# Altium PCB JWB-001.PcbDoc (part 1 of 2)
Units mil, origin at the board's own origin, x right, y up, seen from the top; angles counter-clockwise.
Board outline 944.88 x 944.88 mil, 4 copper layers (Top, Layer 2, Layer 3, Bottom), stack 35.2 mil thick; 81 components, 68 nets, 347 pads, 153 vias.
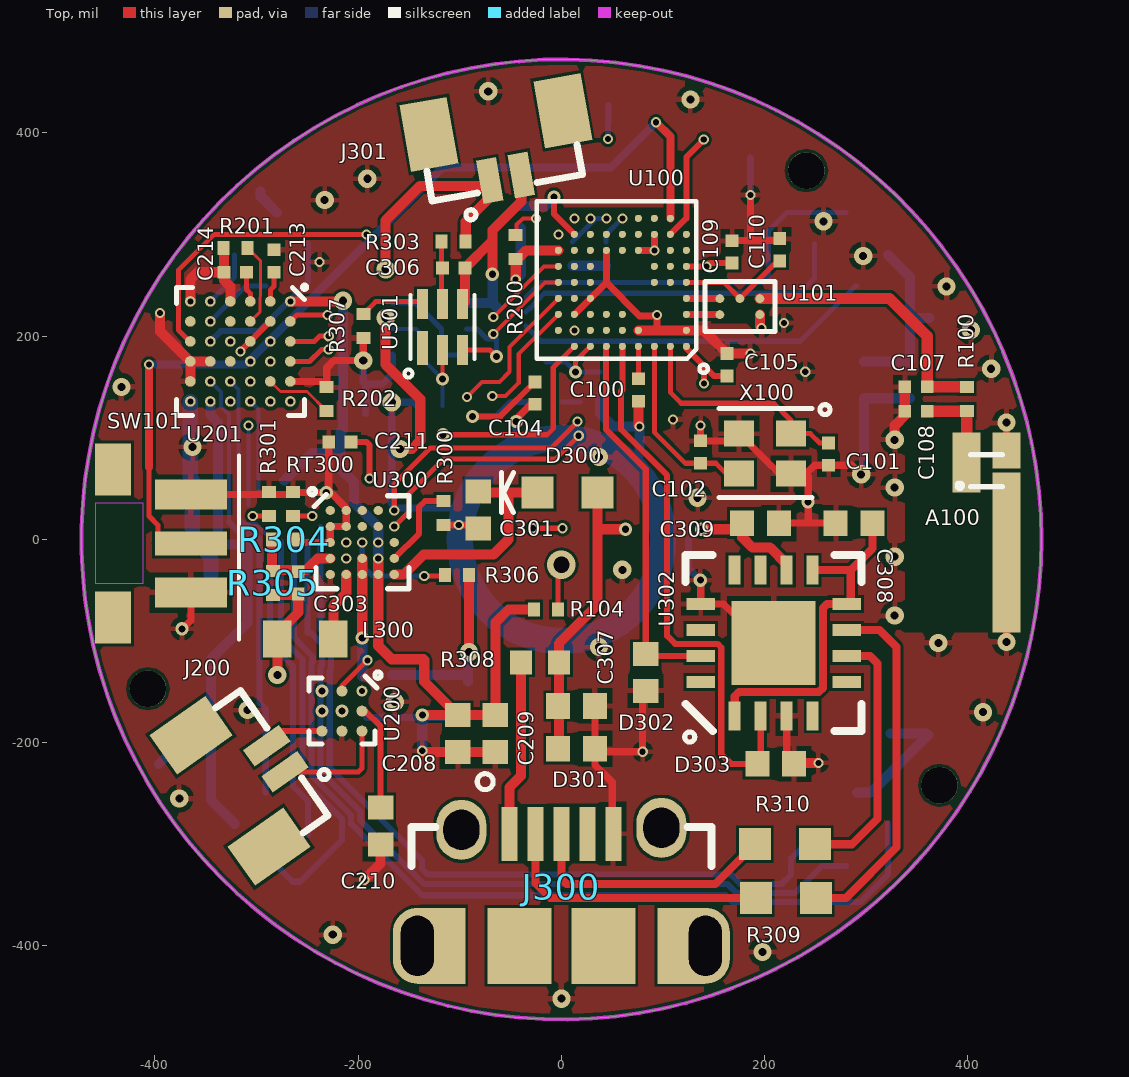
[diagram p0: Top view]
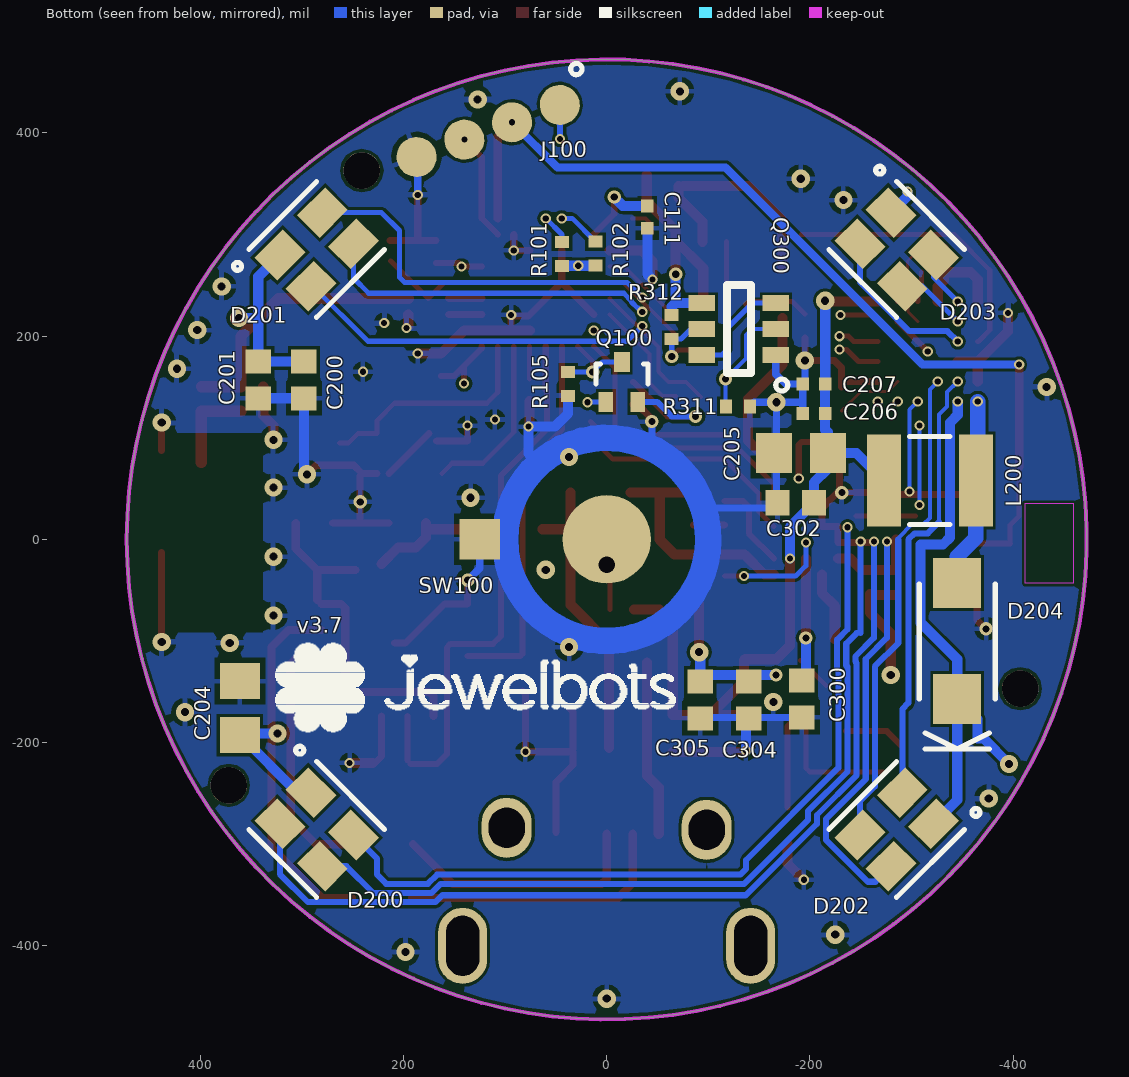
[diagram p1: Bottom view, seen from below]
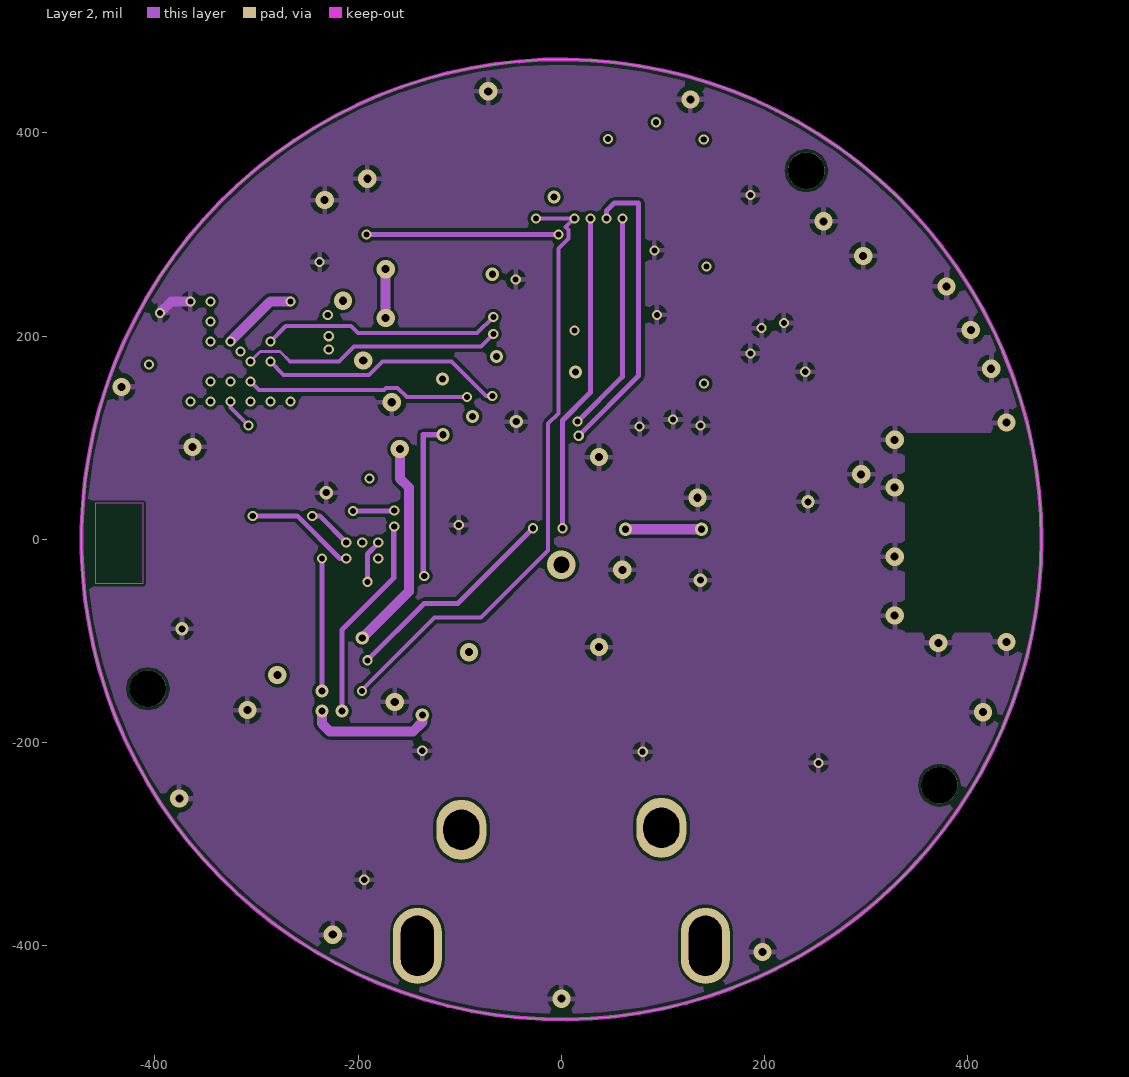
[diagram p2: Layer 2]
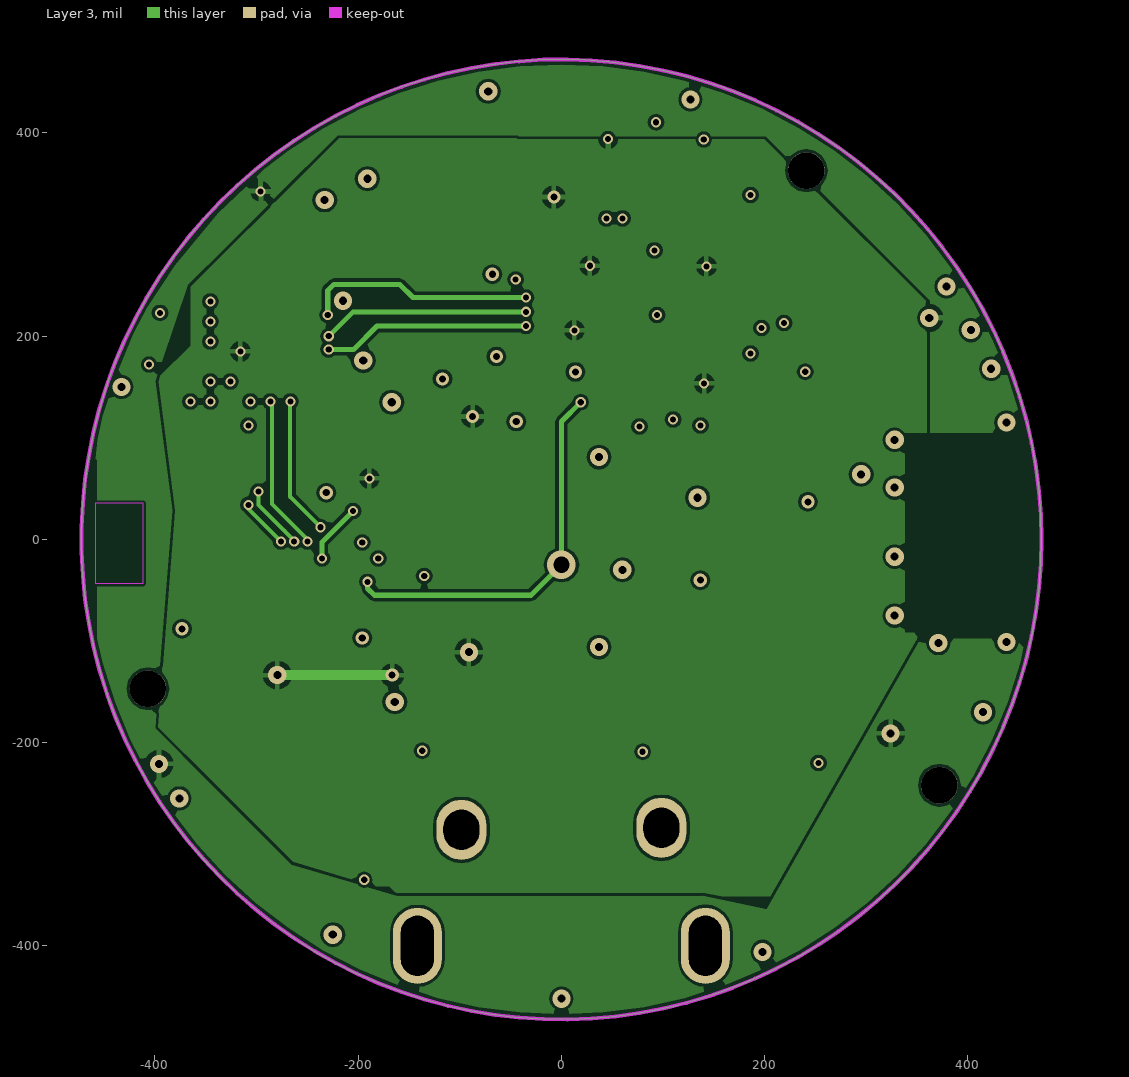
[diagram p3: Layer 3]

## Layer stack, top to bottom
Top Solder: solder mask 0.4, Solder Resist, Dk 3.5
Top: signal copper 1.4
Core 1: prepreg 6, 370HR, Dk 4.02
Layer 2: signal copper 0.7
Core 2: core 19, 370HR, Dk 4.02
Layer 3: signal copper 0.7
Core 3: prepreg 6, 370HR, Dk 4.02
Bottom: signal copper 1.4
Bottom Solder: solder mask 0.4, Solder Resist, Dk 3.5

## Board outline
0,-472.44 cw(c0,0) -472.44,0 cw(c0,0) 0,472.44 cw(c0,0) 472.44,0 cw(c0,0)

## Design rules (kind name [scope] priority, off if disabled: settings)
Clearance Clearance_U200 [InComponent('U200') OR InComponent('U201')] p1: gap=4 except(2.92: Arc-Track Arc-SMDPad Track-Track Track-SMDPad; 2.99: SMDPad-SMDPad; 3: Arc-Arc Arc-THPad Arc-Via Track-THPad Track-Via SMDPad-THPad SMDPad-Via THPad-THPad THPad-Via Via-Via)
Clearance [All] p2: gap=3
Height [All] p1: minheight=0 maxheight=1000 prefheight=100
HoleSize [All] p1: absolutevalues=TRUE maxlimit=100 minlimit=6 maxpercent=80.000 minpercent=20.000
HoleToHoleClearance [All] p1: gap=6 allowstackedmicrovias=TRUE
MinimumSolderMaskSliver [All] p1: minsoldermaskwidth=1
PlaneClearance [All] p1: clearance=4
PolygonConnect [All] p1: connectstyle=Relief reliefconductorwidth=5 reliefentries=4 polygonreliefangle="90 Angle" airgapwidth=5
RoutingVias [All] p1: holewidth=7 width=13 viastyle="Through Hole" minholewidth=6 minwidth=10 maxholewidth=28 maxwidth=50
SilkToSilkClearance [All] p1: silktosilkclearance=1
SilkToSolderMaskClearance [IsPad] p1: minsilkscreentomaskgap=0 clearancetoexposedcopper=TRUE
SolderMaskExpansion SolderMaskExpansion_via [IsVia] p1: expansion=-10
SolderMaskExpansion [All] p2: expansion=2
Width [All] p1: maxlimit=100 minlimit=3 preferedwidth=6
23 further rules are at their usual default settings.

## Classes and differential pairs
component class Interfaces: C200 C201 C204 C205 C206 C207 C208 C209 C210 C211 C213 C214 D200 D201 D202 D203 D204 J200 L200 R200 R201 R202 U200 U201
component class "Power Supplies": C300 C301 C302 C303 C304 C305 C306 C307 C308 C309 D300 D301 D302 D303 J300 J301 L300 Q300 R300 R301 R303 R304 R305 R306 R307 R308 R309 R310 R311 R312 RT300 U300 U301 U302
component class Top: A100 C100 C101 C102 C104 C105 C107 C108 C109 C110 C111 J100 Q100 R100 R101 R102 R104 R105 SW100 SW101 U100 U101 X100

## Components (designator, comment, footprint, x,y, rotation, side; value= is the part's Value field where it differs from the comment)
A100 "Part Number" 2450AT07A0100 418.6,67.6 r270 top
C100 "Part Number0.1uFDNP" "Cap 0201 HD" 76,147 r270 top
C101 "Part Number15pFDNP" "Cap 0201 HD" 263,84 r270 top
C102 "Part Number15pFDNP" "Cap 0201 HD" 137,86 r90 top
C104 "Part Number0.1uFDNP" "Cap 0201 HD" -26,144 r270 top
C105 "Part Number1nFDNP" "Cap 0201 HD" 163,171.98 r90 top
C107 "Part NumberDNPDNP" "Cap 0201 HD" 349,150.19 r180 top
C108 "Part NumberDNPDNP" "Cap 0201 HD" 349,126.19 r180 top
C109 "Part Number47nFDNP" "Cap 0201 HD" 168,283 r90 top
C110 "Part Number2.2nFDNP" "Cap 0201 HD" 215,285 r90 top
C111 "Part Number0.1uFDNP" "Cap 0201 HD" -39.99,317.24 r270 bottom
C200 "Part Number1.0uFDNP" "Cap 0402 HD" 298,157 r270 bottom
C201 "Part Number1.0uFDNP" "Cap 0402 HD" 343,157 r270 bottom
C204 "Part Number10uFDNP" "Cap 0603" 361,-166 r90 bottom
C205 "Part Number10uFDNP" "Cap 0603" -191,85 r0 bottom
C206 "Part Number0.1uFDNP" "Cap 0201 HD" -204,124 r0 bottom
C207 "Part Number0.1uFDNP" "Cap 0201 HD" -204.02,153 r0 bottom
C208 "Part Number4.7uFDNP" "Cap 0402 HD" -102,-191 r270 top
C209 "Part Number1.0uFDNP" "Cap 0402 HD" -65,-191 r270 top
C210 "Part Number1.0uFDNP" "Cap 0402 HD" -178,-282 r270 top
C211 "Part Number0.1uFDNP" "Cap 0201 HD" -218,96 r180 top
C213 "Part Number1.0uFDNP" "Cap 0201 HD" -283,273.98 r90 top
C214 "Part Number0.1uFDNP" "Cap 0201 HD" -321,263 r0 top
C300 "Part Number4.7uFDNP" "Cap 0402 HD" -192,-157 r270 bottom
C301 "Part Number1.0uFDNP" "Cap 0402 HD" -82,29 r270 top
C302 "Part Number4.7uFDNP" "Cap 0402 HD" -186,36 r0 bottom
C303 "Part Number22pFDNP" "Cap 0201 HD" -259,-42.81 r90 top
C304 "Part Number4.7uFDNP" "Cap 0402 HD" -140,-158 r270 bottom
C305 "Part Number1.0uFDNP" "Cap 0402 HD" -92,-158 r270 bottom
C306 "Part Number0.1uFDNP" "Cap 0201 HD" -106,267 r0 top
C307 "Part Number1.0uFDNP" "Cap 0402 HD" 15,-164 r0 top
C308 "Part Number0.1uFDNP" "Cap 0402 HD" 288,16 r180 top
C309 "Part Number4.7uFDNP" "Cap 0402 HD" 196,16 r0 top
D200 "Part Number" 4-PLCC 285.43,-285.43 r45 bottom
D201 "Part Number" 4-PLCC 285.43,285.43 r315 bottom
D202 "Part Number" 4-PLCC -285.43,-285.43 r135 bottom
D203 "Part Number" 4-PLCC -285.43,285.43 r45 bottom
D204 "Part NumberVoltage Rated" SOD-123F_U -345,-100 r90 bottom
D300 "Part NumberVoltage Rated" "Diode 0603 HD" 6,46 r180 top
D301 "Part NumberVoltage Rated" "CAP 0402 HD" 15,-206 r0 top
D302 "Part NumberVoltage Rated" "CAP 0402 HD" 83,-131 r90 top
D303 "Part NumberVoltage Rated" "CAP 0402 HD" 211,-221 r0 top
J100 "Part NumberDNP" TP10R_1.27P-4Pin 116.64,402 r340 bottom
J200 "BM02B-SURS-TF_1" BM02B-SURS-TF -281,-216 r125 top
J300 "Part Number" USB_Micro_RA_W-TABS 0,-400 r0 top
J301 "BM02B-SURS-TF_1" BM02B-SURS-TF -55,356 r10 top
L200 "Part Number4.7uHDNP" "IND 1008" -318,58 r180 bottom
L300 "Part Number2.2uHDNP" "IND 0603" -252,-98 r180 top
Q100 "Part Number" SOT-723 -15,155 r90 bottom
Q300 "Part Number" SC70-6 -130,207 r0 bottom
R100 "Part Number0DNP" "RES 0201 HD" 399,138.19 r270 top
R101 "Part Number3.3kDNP" "RES 0201 HD" 44,281 r270 bottom
R102 "Part Number3.3kDNP" "RES 0201 HD" 11,281.19 r270 bottom
R104 "Part Number10kDNP" "RES 0201 HD" -15.19,-69 r180 top
R105 "Part Number10kDNP" "RES 0201 HD" 38,153 r90 bottom
R200 "Part Number10kDNP" "RES 0201 HD" -45,288 r90 top
R201 "Part Number82kDNP" "RES 0201 HD" -320.81,287 r0 top
R202 "Part Number30.1kDNP" "RES 0201 HD" -231,138 r270 top
R300 "Part Number4.12kDNP" "RES 0201 HD" -116,26 r90 top
R301 "Part Number10kDNP" "RES 0201 HD" -288,35 r270 top
R303 "Part Number330DNP" "RES 0201 HD" -106,293 r0 top
R304 "Part Number150kDNP" "RES 0201 HD" -273,0 r180 top
R305 "Part Number301kDNP" "RES 0201 HD" -284,-42.81 r270 top
R306 "Part Number10kDNP" "RES 0201 HD" -103,-35 r0 top
R307 "Part Number2.2kDNP" "RES 0201 HD" -195,210 r90 top
R308 "Part Number0DNP" "RES 0402" -21,-121 r0 top
R309 "Part Number27DNP" "RES 0603 HD" 221,-353 r0 top
R310 "Part Number27DNP" "RES 0603 HD" 220,-300 r0 top
R311 "Part NumberDNPDNP" "RES 0201 HD" -129,131 r0 bottom
R312 "Part NumberDNPDNP" "RES 0201 HD" -64,209 r270 bottom
RT300 "Res Thermal" "RES 0201 HD" -264,35 r90 top
SW100 "Part Number" GX05170 0,0 r0 bottom
SW101 "TL3340" TL3340 -400,-4 r270 top
U100 "Part NumberDNP" CFAC_WLCSP 60,253 r180 top
U101 "Part Number" BGA0.4P2x3-5Pin 175.68,229.13 r0 top
U200 "Part Number" BGA0.5P3x3-9Pin -216,-169 r270 top
U201 "Part NumberDNP" BGA0.5P6x6-36Pin -316,185 r270 top
U300 "Part NumberDNP" BGA0.4P5x5-25Pin -196,-3 r0 top
U301 "Part Number" SON0.5P-6Pin -117,209 r90 top
U302 "Part Number" QFN0.65P4x4-16Pin_W-Pad 209,-102 r90 top
X100 "Part NumberDNP" XTAL_ABM11-16 200.37,84.41 r180 top

## Footprints (in the part's own frame and the unit in brackets; to place one, negate y for a bottom-side part, rotate by r counter-clockwise, add the part's x,y. Pads: shape width x height; smd on the part's side, far side on the other; paste and mask are expansions set on the pad)
4-PLCC [mm] "4 Pin Plastic Leaded Chip Carrier, 2mm x 2mm"
  rect 1x0.8 smd: 1(0.75,-0.55) 2(-0.75,-0.55) 3(-0.75,0.55) 4(0.75,0.55)
  silkscreen extent -1.2,-1.2 1.8,1.2, body extent -1.05,-1.05 1.05,1.05, height 1
2450AT07A0100 [mm] "Chip Antenna, 4 pin w/keepout area"
  rect 1.5x0.7 smd paste-0.4 mask-0.4: 1(-0.2,-0.5)
  rect 4x0.7 smd paste-2 mask-2: 2(2.05,0.5)
  rect 0.9x0.7 smd paste-0.45 mask-0.45: 3(-0.5,0.5)
  Multi-Layer pour cut-out: -0.95,0.95 -0.95,-2.05 4.05,-2.05 4.05,0.95
  silkscreen extent -0.4,-0.74 0.44,0.4, body extent -0.25,-0.5 0.25,0.5, height 0.37
BGA0.4P2x3-5Pin [mm] "UFBGA, 5 pin 2 row x 3 column, .4mm x .5mm pitch,  1.385mm x .855mm"
  round 0.22 smd mask+0.05: A1(0.5,0.2) A2(0,0.2) A3(-0.5,0.2) B1(0.5,-0.2) B3(-0.5,-0.2)
  Top pour cut-out: -0.725,-0.43 0.725,-0.43 0.725,0.44 -0.725,0.44
  silkscreen extent -0.87,-0.63 0.87,0.63, body extent -0.72,-0.45 0.72,0.45, height 0.69
BGA0.4P5x5-25Pin [mil] "XBGA 0.4mm pitch, 5 row x 5 column, 25 Pin, 2mm x 2mm, TI S-XBGA-N25 YFF"
  rrect100% 9x9 smd mask+1.97: A1(-31.5,31.5) A2(-15.75,31.5) A3(0,31.5) A4(15.75,31.5) A5(31.5,31.5) B1(-31.5,15.75) B2(-15.75,15.75) B3(0,15.75) B4(15.75,15.75) B5(31.5,15.75) C1(-31.5,0) C2(-15.75,0) C3(0,0) C4(15.75,0) C5(31.5,0) D1(-31.5,-15.75) D2(-15.75,-15.75) D3(0,-15.75) D4(15.75,-15.75) D5(31.5,-15.75) E1(-31.5,-31.5) E2(-15.75,-31.5) E3(0,-31.5) E4(15.75,-31.5) E5(31.5,-31.5)
  silkscreen extent -52,-46 46,53, body extent -41,-41 41,41, height 25
BGA0.5P3x3-9Pin [mm] "DSBGA 0.5mm pitch, 3 row x 3 column, 9 Pin, 1.47mm x 1.47mm, TI S-XBGA-N9 YZF"
  round 0.275 smd paste+0 mask+0.05: A1(-0.5,0.5) A2(0,0.5) A3(0.5,0.5) B1(-0.5,0) B2(0,0) B3(0.5,0) C1(-0.5,-0.5) C2(0,-0.5) C3(0.5,-0.5)
  silkscreen extent -0.98,-0.82 0.83,0.98, body extent -0.73,-0.73 0.72,0.73, height 0.63
BGA0.5P6x6-36Pin [mm] "BGA,Pitch 0.5mm, 36 Pin 6x6, Body 3x3mm"
  round 0.265 smd paste-0.132 mask+0.05: A1(-1.25,1.25) A2(-0.75,1.25) A3(-0.25,1.25) A4(0.25,1.25) A5(0.75,1.25) A6(1.25,1.25) B1(-1.25,0.75) B2(-0.75,0.75) B3(-0.25,0.75) B4(0.25,0.75) B5(0.75,0.75) B6(1.25,0.75) C1(-1.25,0.25) C2(-0.75,0.25) C3(-0.25,0.25) C4(0.25,0.25) C5(0.75,0.25) C6(1.25,0.25) D1(-1.25,-0.25) D2(-0.75,-0.25) D3(-0.25,-0.25) D4(0.25,-0.25) D5(0.75,-0.25) D6(1.25,-0.25) E1(-1.25,-0.75) E2(-0.75,-0.75) E3(-0.25,-0.75) E4(0.25,-0.75) E5(0.75,-0.75) E6(1.25,-0.75) F1(-1.25,-1.25) F2(-0.75,-1.25) F3(-0.25,-1.25) F4(0.25,-1.25) F5(0.75,-1.25) F6(1.25,-1.25)
  silkscreen extent -1.65,-1.6 1.6,1.66, body extent -1.53,-1.53 1.53,1.53, height 0.68
BM02B-SURS-TF [mm]
  rect 1.2x1.7 smd: 0(-1.7,1.4) 0(1.7,1.4)
  rect 0.5x1.1 smd: 1(-0.4,0) 2(0.4,0)
  silkscreen extent -1.9,-0.89 1.91,0.51, body extent -1.9,-0.28 1.9,1.97, height 2.7
"Cap 0201 HD" [mm] "Chip Capacitor, 2-Leads, Body 0.60x0.30mm, IPC High Density"
  rect 0.32x0.32 smd mask+0.05: 1(-0.28,0) 2(0.28,0)
  body extent -0.32,-0.17 0.32,0.17, height 0.33
"Cap 0402 HD" [mm] "Chip Capacitor, 2-Leads, Body 1.00x0.50mm, IPC Medium Density"
  rect 0.6x0.64 smd: 1(-0.46,0) 2(0.46,0)
  body extent -0.55,-0.3 0.55,0.3, height 0.6
"CAP 0402 HD" [mm] "Chip Capacitor, 2-Leads, Body 1.00x0.50mm, IPC Medium Density"
  rect 0.6x0.64 smd: 1(-0.46,0) 2(0.46,0)
  body extent -0.55,-0.3 0.55,0.3, height 0.6
"Cap 0603" [mm]
  rect 0.9x1 smd: 1(-0.675,0) 2(0.675,0)
  body extent -0.87,-0.48 0.87,0.47, height 0.85
CFAC_WLCSP [mm] "BGA, 62-Leads, Body 3.83x3.83mmx0.55mm, Pitch 0.40mm"
  round 0.18 smd mask+0.06: A1(-1.6,1.6) A2(-1.2,1.6) A3(-0.8,1.6) A4(-0.4,1.6) A5(0,1.6) A6(0.4,1.6) A7(0.8,1.6) A8(1.2,1.6) B1(-1.6,1.2) B4(-0.4,1.2) B5(0,1.2) B6(0.4,1.2) B7(0.8,1.2) B8(1.2,1.2) B9(1.6,1.2) C1(-1.6,0.8) C5(0,0.8) C6(0.4,0.8) C7(0.8,0.8) C8(1.2,0.8) C9(1.6,0.8) D1(-1.6,0.4) D7(0.8,0.4) D8(1.2,0.4) D9(1.6,0.4) E1(-1.6,0) E2(-1.2,0) E3(-0.8,0) E7(0.8,0) E8(1.2,0) E9(1.6,0) F1(-1.6,-0.4) F2(-1.2,-0.4) F3(-0.8,-0.4) F7(0.8,-0.4) F8(1.2,-0.4) F9(1.6,-0.4) G1(-1.6,-0.8) G2(-1.2,-0.8) G3(-0.8,-0.8) G4(-0.4,-0.8) G5(0,-0.8) G6(0.4,-0.8) G7(0.8,-0.8) G8(1.2,-0.8) G9(1.6,-0.8) H1(-1.6,-1.2) H2(-1.2,-1.2) H3(-0.8,-1.2) H4(-0.4,-1.2) H5(0,-1.2) H6(0.4,-1.2) H7(0.8,-1.2) H8(1.2,-1.2) H9(1.6,-1.2) J2(-1.2,-1.6) J3(-0.8,-1.6) J4(-0.4,-1.6) J5(0,-1.6) J6(0.4,-1.6) J7(0.8,-1.6) J8(1.2,-1.6)
  Top pour cut-out: -1.8,1.85 -1.8,-1.875 1.85,-1.875 1.85,1.85
  silkscreen extent -2.14,-2.02 2.14,2.26, body extent -1.78,-2 2.12,1.88, height 0.56
"Diode 0603 HD" [mm] "Chip Diode, 2-Leads, Body 1.80x1.0mm, IPC High Density"
  rect 0.8x0.8 smd: A(-0.75,0) C(0.75,0)
  silkscreen extent 1.35,-0.5 1.65,0.5, body extent -0.9,-0.5 0.9,0.5, height 0.85
GX05170 [mil] "Snap dome, 5.3mm dia"
  round 87 smd paste-50 mask+70: 1(0,0)
  rect 40x40 smd paste-40: 2(125,0)
  Top pour cut-out: -26.36,95 40,95 95,40 95,-45 45,-95 -45,-95 -95,-45 -95,47.81
  Top lines w26: -95.06,-31.04 ccw(c0,0) 53.88,-84.24 ccw(c0,0) 66.9,-74.33 ccw(c0,0) 100,0 ccw(c0,0) -95.06,-31.04
  body extent -104,-104 104,104, height 10
"IND 0603" [mm] "Chip Inductor 0603, 2-Leads, Body 1.60x0.80mm, IPC High Density"
  rect 0.71x0.92 smd: 1(-0.7,0) 2(0.7,0)
  body extent -0.9,-0.5 0.9,0.5, height 1
"IND 1008" [mm] "Inductor 1008, 2.7mm x 2.2mm"
  rect 0.85x2.3 smd: 1(-1.15,0) 2(1.15,0)
  silkscreen extent -0.5,-1.1 0.5,1.1, body extent -1.35,-1.1 1.35,1.12, height 1
QFN0.65P4x4-16Pin_W-Pad [mm] "QFN, 16-Leads, Body 4x4mm, Pitch 0.65mm, Thermal Pad 2.1x2.1mm, IPC High Density"
  rect 0.72x0.3 smd: 1(-1.825,0.975) 2(-1.825,0.325) 3(-1.825,-0.325) 4(-1.825,-0.975) 9(1.825,-0.975) 10(1.825,-0.325) 11(1.825,0.325) 12(1.825,0.975)
  rect 0.3x0.72 smd: 5(-0.975,-1.825) 6(-0.325,-1.825) 7(0.325,-1.825) 8(0.975,-1.825) 13(0.975,1.825) 14(0.325,1.825) 15(-0.325,1.825) 16(-0.975,1.825)
  rect 2.1x2.1 smd paste-1.05: 17(0,0)
  silkscreen extent -2.47,-2.2 2.2,2.22, body extent -2.05,-2.05 2.05,2.05, height 0.8
"RES 0201 HD" [mm] "Resistor, 0201 High Density"
  rect 0.3x0.35 smd mask+0.05: 1(-0.3,0) 2(0.3,0)
  body extent -0.32,-0.16 0.32,0.17, height 0.26
"RES 0402" [mm] "Chip Resistor, 2-Leads, Body 1.05x0.54mm, IPC Medium Density"
  rect 0.55x0.6 smd: 1(-0.475,0) 2(0.475,0)
  body extent -0.55,-0.3 0.55,0.3, height 0.4
"RES 0603 HD" [mm] "Chip Resistor, 2-Leads, Body 1.60x0.82mm, IPC High Density"
  rect 0.8x0.8 smd: 1(-0.75,0) 2(0.75,0)
  body extent -0.85,-0.48 0.85,0.48, height 0.55
SC70-6 [mm] "SC70-6, 6-Pin, Body 2.00x2.10mm, Pitch 0.65mm, IPC High Density"
  rect 0.66x0.4 smd: 1(-0.925,0.65) 2(-0.925,0) 3(-0.925,-0.65) 4(0.925,-0.65) 5(0.925,0) 6(0.925,0.65)
  silkscreen extent -1.22,-1.1 0.3,1.55, body extent -0.67,-1.1 0.67,1.1, height 1.1
SOD-123F_U [mm] "SOD-123F, Unidirectional, 2-Leads, Body 1.65x3.60mm, IPC High Density"
  rect 1.25x1.2 smd: A(1.45,0) C(-1.45,0)
  silkscreen extent -2.7,-0.95 1.43,0.95, body extent -1.45,-0.9 1.45,0.9, height 0.98
SON0.5P-6Pin [mm] "Small Outline No-Lead Package, 0.5pitch, 6 pin, no thermal pad, 1.5mm x 1.5mm"
  rect 0.85x0.28 smd mask+0.05: 1(-0.525,0.5)
  rect 0.75x0.28 smd mask+0.05: 2(-0.575,0) 3(-0.575,-0.5) 4(0.575,-0.5) 5(0.575,0) 6(0.575,0.5)
  silkscreen extent -1.26,-0.8 0.8,0.95, body extent -0.77,-0.78 0.77,0.77, height 0.8
SOT-723 [mm] "SOT-723, 3-Leads, 1.20mm x 1.20mm, Pitch 0.40mm, IPC High Density"
  rect 0.5x0.36 smd: 1(-0.5,0.4) 2(-0.5,-0.4)
  rect 0.5x0.4 smd: 3(0.5,0)
  silkscreen extent -0.05,-0.65 0.45,0.65, body extent -0.45,-0.65 0.45,0.65, height 0.55
TL3340 [mm]
  rect 1.3x0.9 smd: 0(-1.85,-1.05) 0(1.85,-1.05)
  rect 0.75x1.8 smd: 1(-1.225,0.9) 1(1.225,0.9)
  rect 0.6x1.8 smd: 2(0,0.9)
  Keep-Out Layer region: -1,-1.5 1,-1.5 1,-0.3 -1,-0.3
  silkscreen extent -2.2,2.1 2.4,2.1, body extent -2.25,-2.1 2.25,1.57, height 3.25
TP10R_1.27P-4Pin [mm] "Test Points, 1.0mm Diameter, 1.27mm(0.050\") pitch, 4 Pins"
  round 1 smd paste-2 mask+0.08: 1(-1.905,0) 2(-0.635,0) 3(0.635,0) 4(1.905,0)
  silkscreen extent -2.74,-0.84 -2.46,-0.56, body extent -2.4,-0.5 2.41,0.5, height 0.1
USB_Micro_RA_W-TABS [mm] "USB Micro-AB Connector, 5-Leads, Pitch 0.65mm, 8mm x 5mm"
  rect 0.4x1.35 smd: 1(-1.3,2.8) 2(-0.65,2.8) 3(0,2.8) 4(0.65,2.8) 5(1.3,2.8)
  oval 1.225x1.9 hole 0.825 slot 1.5 at 90 deg: 6(-3.6,0) 6(3.6,0.001)
  rect 1.2x1.9 smd: 6(-3,0) 6(3,0)
  oval 1.25x1.5 hole 0.9 slot 1 at 90 deg: 6(-2.5,2.9) 6(2.5,2.95)
  rect 1.6x1.9 smd: 6(-1.05,0) 6(1.05,0)
  silkscreen extent -3.75,2 3.75,4.3, body extent -4,-2.62 4,3.43, height 2.83
XTAL_ABM11-16 [mm] "Crystal, 4 lead, 2.0mm x 1.6mm"
  rect 0.75x0.65 smd: 1(-0.65,-0.5) 2(0.65,-0.5) 3(0.65,0.5) 4(-0.65,0.5)
  silkscreen extent -1.63,-1.22 1.15,1.1, body extent -0.98,-0.8 1.02,0.8, height 0.58

## Part data
A100: library part 2450AT07A0100, "ANTENNA SMD EIA 0402 2.4GHZ"
C100 C104 C111 C206 C207 C211 C214 C306: library part "Cap 0201 0.1uF 6.3V", "CAP CER 0.1UF 6.3V 10% X5R 0201"
C101 C102: library part "Cap 0201 11pF 25V", "CAP CER 15PF 25V NP0 0201"
C105: library part "Cap 0201 1nF 25V", "CAP CER 1000PF 25V 10% X7R 0201"
C107 C108: library part "Cap 0201 Generic", "Capacitor, Ceramic 0201, DNP"
C109: library part "Cap 0201 47nF 10V", "CAP CER 0.047UF 10V 10% X5R 0201"
C110: library part "Cap 0201 2.2nF 16V", "CAP CER 2200PF 16V 10% X7R 0201"
C200 C201 C209 C210 C301 C305 C307: library part "Cap 0402 1.0uF 10V", "CAP CER 1UF 10V 10% X5R 0402"
C204 C205: library part "Cap 0603 10uF 10V", "CAP CER 10UF 10V 20% X5R 0603"
C208 C300 C302 C304 C309: library part "Cap 0402 4.7uF 10V", "CAP CER 4.7UF 10V 20% X5R 0402"
C213: library part "Cap 0201 1.0uF 6.3V", "CAP CER 1UF 6.3V 20% X5R 0201"
C303: library part "Cap 0201 22pF 50V", "CAP CER 22PF 50V 5% NP0 0201"
C308: library part "Cap 0402 0.1uF 10V", "CAP CER 0.1UF 10V 10% X5R 0402"
D200 D201 D202 D203: library part CLMVB-FKA-CFHEHLCBB7A363, "LED RGB 3-IN-1 SMD 4PLCC"
D204: library part MBR120VLSFT3G, "DIODE SCHOTTKY 20V 1A SOD123FL"
D300: library part CDBU05x0, "DIODE SCHOTTKY 20V 500MA 0603"
D301 D302 D303: library part SESD0402P1BN-0450-090, "TVS DIODE 6VWM 12VC 0402"
J100: library part SWD_Pogo_TP, "Test points for 4-wire Serial Wire Debugger header Pogo Pin harness, DNP"
J200 J301: "CONN HDR SUR TOP 2POS 0.8MM TIN"
J300: library part USB_Micro_B_W-Tabs, "CONN USB MICRO B RECPT SMT R/A"
L200: library part "Ind 1008 4.7uH 650mA", "FIXED IND 4.7UH 1A 250 MOHM SMD"
L300: library part "Ind 0603 2.2uH 160mA", "FIXED IND 2.2UH 600MA 170 MOHM"
Q100: library part MOSFET-P, "MOSFET P-CH 20V 0.1A VMT3"
Q300: library part Si1902CDL, "MOSFET 2N-CH 20V 1.1A SC-70-6"
R100: library part "Res 0201 0R Jumper", "RES SMD 0.0OHM JUMPER 1/20W 0201"
R101 R102: library part "Res 0201 3.3k 5%", "RES SMD 3.3K OHM 5% 1/20W 0201"
R104 R105 R200 R301 R306: library part "Res 0201 10k 5%", "RES SMD 10K OHM 5% 1/20W 0201"
R201: library part "Res 0201 Generic", "RES SMD 82K OHM 1% 1/20W 0201"
R202: library part "Res 0201 Generic", "RES SMD 30.1K OHM 1% 1/20W 0201"
R300: library part "Res 0201 Generic", "RES SMD 4.12K OHM 1% 1/20W 0201"
R303: library part "Res 0201 330R 5%", "RES SMD 330 OHM 5% 1/20W 0201"
R304: library part "Res 0201 150k 1%", "RES SMD 150K OHM 1% 1/20W 0201"
R305: library part "Res 0201 301k 1%", "RES SMD 301K OHM 1% 1/20W 0201"
R307: library part "Res 0201 2.2k 5%", "RES SMD 2.2K OHM 5% 1/20W 0201"
R308: library part "Res 0402 0R Jumper", "RES SMD 0.0OHM JUMPER 1/16W 0402"
R309 R310: library part "Res 0603 27R 5%", "RES SMD 27 OHM 5% 1/10W 0603"
R311 R312: library part "Res 0201 Generic", "Resistor, 0201, DNP"
RT300: library part "Therm 0201 10k NTC", "THERMISTOR 10K OHM NTC 0201 SMD"
SW100: library part GX05170, "Snap Dome, high activation force, 5.3mm dia"
SW101: "SWITCH TACTILE SPST-NO 0.05A 12V"
U100: library part nRF51822-CFAC, "IC SOC 2.4GHZ MULTIPROTO 62WLCS"
U101: library part BAL-NRF02D3, "IC BALUN FOR NRF51822 WLCSP"
U200: library part DRV2604L, "IC ERM/LRA HAPTIC DRIVER 9DSBGA"
U201: library part LP55281TL, "IC LED DRIVER RGLTR DIM 36USMD"
U300: library part TPS65720, "PMU for IC PMU 2CH CONV/LDO 25DSBGA"
U301: library part BQ29700, "IC LITHIUM BATT PROTECT 6-SON"
U302: library part FT230XQ, "IC USB SERIAL BASIC UART 16QFN"
X100: library part XTAL_ABM11-16, "CRYSTAL 16.0000MHZ 10PF SMD"

## Free pads (board coordinates)
  round 35.98 hole 35.98 unplated: 0(-407,-147) 0(241,363) 0(372,-242)

## Via types
v1: diameter 10, hole 6, Top to Layer 2, tented top, 27 vias
v2: diameter 18, hole 8, Top to Bottom, 26 vias
v3: diameter 10, hole 6, Top to Bottom, 24 vias
v4: diameter 10, hole 6, Top to Bottom, tented both sides, 15 vias
v5: diameter 13, hole 7, Top to Bottom, tented top, 12 vias
v6: diameter 10, hole 6, Layer 3 to Bottom, tented bottom, 8 vias
v7: diameter 13, hole 7, Top to Layer 2, tented top, 7 vias
v8: diameter 18, hole 8, Top to Layer 2, 5 vias
v9: diameter 10, hole 6, Top to Layer 2, 5 vias
v10: diameter 18, hole 8, Top to Bottom, tented top, 5 vias
v11: diameter 10, hole 6, Top to Bottom, tented top, 4 vias
v12: diameter 10, hole 6, Layer 3 to Bottom, 3 vias
v13: diameter 18, hole 8, Layer 3 to Bottom, 3 vias
v14: diameter 10, hole 6, Layer 2 to Layer 3, 3 vias
v15: diameter 18, hole 8, Top to Layer 2, tented top, 2 vias
v16: diameter 28, hole 16, Top to Bottom, 1 vias
v17: diameter 10, hole 6, Top to Bottom, tented bottom, 1 vias
v18: diameter 10/10 (per signal layer), hole 6, Layer 3 to Bottom, tented bottom, 1 vias
v19: diameter 13, hole 7, Layer 3 to Bottom, 1 vias

## Nets (pads, with @x,y where several pads share a name; then routed paths per layer and width w, separated by ;. In a path a pad name is that pad's centre, name@x,y a point inside that pad or via, vN(x,y) a via of type N, cw(c..) or ccw(c..) an arc to the next point about the centre after c; other vN are vias at no path point)
1V8: C104.1 C105.1 C109.1 C111.1 C211.1 C303.1 C304.1 C305.1 J100.1 L300.2 Q100.2 R101.2 R102.2 R305.2 R306.2 U100.A1 U100.B8 U100.F1 U100.H8 U201.B2 U201.C3 | length 897.1
  Top w6: v3(-316,185) U201.C3@-306.16,194.84 U201.B2@-286.47,214.53 ; C211.1@-206.98,96 -192,96 -189,93 v3(-189,60) ; v5(-87.41,121) -60.02,121 C104.1@-26,155.02 ; v5(-7.41,337) -7.41,320.41 U100.H8@12.76,300.24 ; U100.A1@122.99,190.01 122.99,188.01 140.5,170.5 ; U100.F1@122.99,268.75 v3(142.75,268.75) 145.98,271.98 C109.1@168,271.98 ; v3(140.5,153.5) 140.5,170.5 ; C105.1@163,160.95 150.05,160.95 140.5,170.5
  Top w10: R305.2@-284,-54.62 -259.79,-54.62 C303.1@-259,-53.83 -259,-72 -279.56,-92.56 L300.2@-279.56,-98 v10(-279.56,-133.56) ; v10(-91,-111) R306.2@-91,-34.5
  Layer 3 w10: v10(-279.56,-133.56) v19(-166.56,-133.56)
  Bottom w6: v5@-87,121 -64,121 -49.68,135.31 Q100.2@-30.75,135.31 ; v3(46,394) 46,411 46.17,411.17 J100.1@46.17,427.65
  Bottom w10: v19(-166.56,-133.56) C305.1@-98.33,-133.56 ; C305.1@-92,-139.89 -92,-112 v10(-91,-111) ; C111.1@-39.99,328.27 -15.73,328.27 v5@-7,337 ; R102.2@11,269.38 R101.2@43.81,269.38
  other v4: 12.76,205.76
  other v12: 28,269.38
3V3: C308.1 U302.1 U302.8 U302.9 | length 335.2
  Top w8: U302.1@170.61,-173.85 170.61,-154.39 174.66,-150.34 253.24,-150.34 257.34,-146.24 257.34,-67.66 261.39,-63.61 U302.8@280.85,-63.61 ; U302.9@247.39,-30.15 284.85,-30.15 ; U302.8@284.85,-59.61 284.85,-30.15 ; C308.1@306.11,16 306.11,-8.89 284.85,-30.15
5V: C307.1 C309.1 D300.A D301.1 R308.2 U302.10 | length 472
  Top w10: D301.1@-2.3,-205.19 R308.2@-2.3,-121 -2.3,-102.3 35.53,-64.47 35.53,10 ; D300.A@35.53,46 35.53,10 ; v7(63,10) 35.53,10 ; v7(138,10) C309.1@171.89,10 ; C309.1@177.89,16 177.89,2.11 187.98,-7.98 205.42,-7.98 U302.10@221.8,-24.35
  Layer 2 w10: v7(63,10) v7(138,10)
\LED_CS: U100.D9 U201.C5 | length 365.7
  Top w4: v1(-93,140) -78,155 -61,155 -51,165 -51,189.24 U100.D9@-2.99,237.25
  Layer 2 w4: v1(-306.16,155.47) -297.69,147 -174.8,147 -172.8,149 -161.2,149 -152.2,140 v1(-93,140)
\LED_RST: U100.H9 U201.F3 | length 464
  Top w5: U201.F3@-365.21,194.84 -365.84,194.84 -377,206 -377,265 -341.76,300.24 v1(-191.76,300.24)
  Layer 2 w5: v1(-191.76,300.24) v1(-2.99,300.24)
\PB_IN: Q100.1 R104.1 SW100.1 U300.C4 | length 486.8
  Top w5: R104.1@-3.38,-69 -3.38,-28.38 v16(0,-25)
  Layer 2 w5: v14(-190.75,-41.75) -190.75,-14.4 -180.25,-3.9 v1(-180.25,-3)
  Layer 3 w5: v14(-190.75,-41.75) -190.75,-48.25 -184,-55 -30,-55 v16(0,-25) 0,116 v12(19,135)
  Bottom w5: Q100.1@0.75,135.31 v12@18.68,135.31
\RESET: J100.2 SW101.2 U100.J2 | length 910.5
  Top w5: -406,71 -406,23 -397,14 SW101.2@-397,-4
  Top w6: SW101.2@-397,-4 SW101.2@-364.57,-4
  Top w8: -406,71 v3(-406,172) ; v3(93.15,410.55) 107.24,396.46 U100.J2@107.24,315.99
  Bottom w8: v3(-406,172) -311,172 -117,366 48.6,366 v3(93.15,410.55)
ANT1: U100.D1 U101.A3 | length 32.8
  Top w7: U100.D1@122.99,237.25 U101.A3@155.75,237.25
ANT2: U100.C1 U101.B3 | length 32.8
  Top w7: U100.C1@122.99,221.5 U101.B3@155.75,221.5
ANT_MATCH: A100.1 C108.1 R100.2 | length 89.9
  Top w11: C108.1@360.02,126.19 398.81,126.19 R100.2@399,126.38 A100.1@399,75.56
ANT_OUT: C107.1 R100.1 U101.A1 | length 268.6
  Top w11: U101.A1@195.37,237 323,237 360.02,199.98 C107.1@360.02,150.19 R100.1@398.81,150.19
BLUE1: D200.2 U201.A6 | length 936.3
  Layer 3 w4: v4@-267,135.57 -267,42 v6(-237,12)
  Bottom w6: v6(-237,12) -237,-88.54 -226.76,-98.79 -226.76,-127.67 -228,-128.91 -228,-224.82 -137.27,-315.54 -137.27,-324.27 -131.54,-330 167,-330 176,-339 217,-339 226,-330 226,-314.24 D200.2@249.24,-291
  other v4: -266.79,135.79
BLUE2: D201.2 U201.A2 | length 642.8
  Top w5: U201.A2@-266.79,214.53 -260.32,221 v4(-230,221)
  Layer 3 w5: v4(-230,221) -230,245 -224,251 -159,251 -146,238 v6(-35,238)
  Bottom w5: v6(-35,238) -20,253 199,253 204,258 204,304 221.62,321.62 D201.2@279.86,321.62
BLUE3: D202.2 U201.D6 | length 560.8
  Layer 2 w4: v1(-325.84,135.79) -325.84,129.84 v4(-308,112)
  Layer 3 w4: v6@-308,30 v6(-276,-2)
  Bottom w4: v6(-308,34) v4(-308,112)
  Bottom w6: D202.2@-279.86,-321.62 -264.49,-337 -257,-337 -216,-296 -216,-275 -255,-236 -255,-117.73 -275.86,-96.86 -276,-97 v6(-276,-2)
BLUE4: D203.2 U201.E1 | length 55.6
  Bottom w5: v3(-345.53,234.21) -321.62,258.12 D203.2@-321.62,279.86
BUTTON: Q100.3 R105.2 U100.A7 | length 88.4
  Top w5: v5(13.78,164.81) 13.78,175.28 U100.A7@28.5,190.01
  Bottom w5: Q100.3@-15,174.69 4.32,174.69 14.19,164.81 R105.2@38,164.81